# Altium PCB PCB_Stellaris.PcbDoc (part 3 of 3)
Units mm, origin at the board's own origin, x right, y up, seen from the top; angles counter-clockwise.
Board outline 50.8 x 63.5 mm, 6 copper layers (L1, L2 (GND), L3, L4, L5 (VCC), L6), stack 1.551 mm thick; 95 components, 90 nets, 373 pads, 126 vias.
Unrouted connection lines stored in the file: 1.
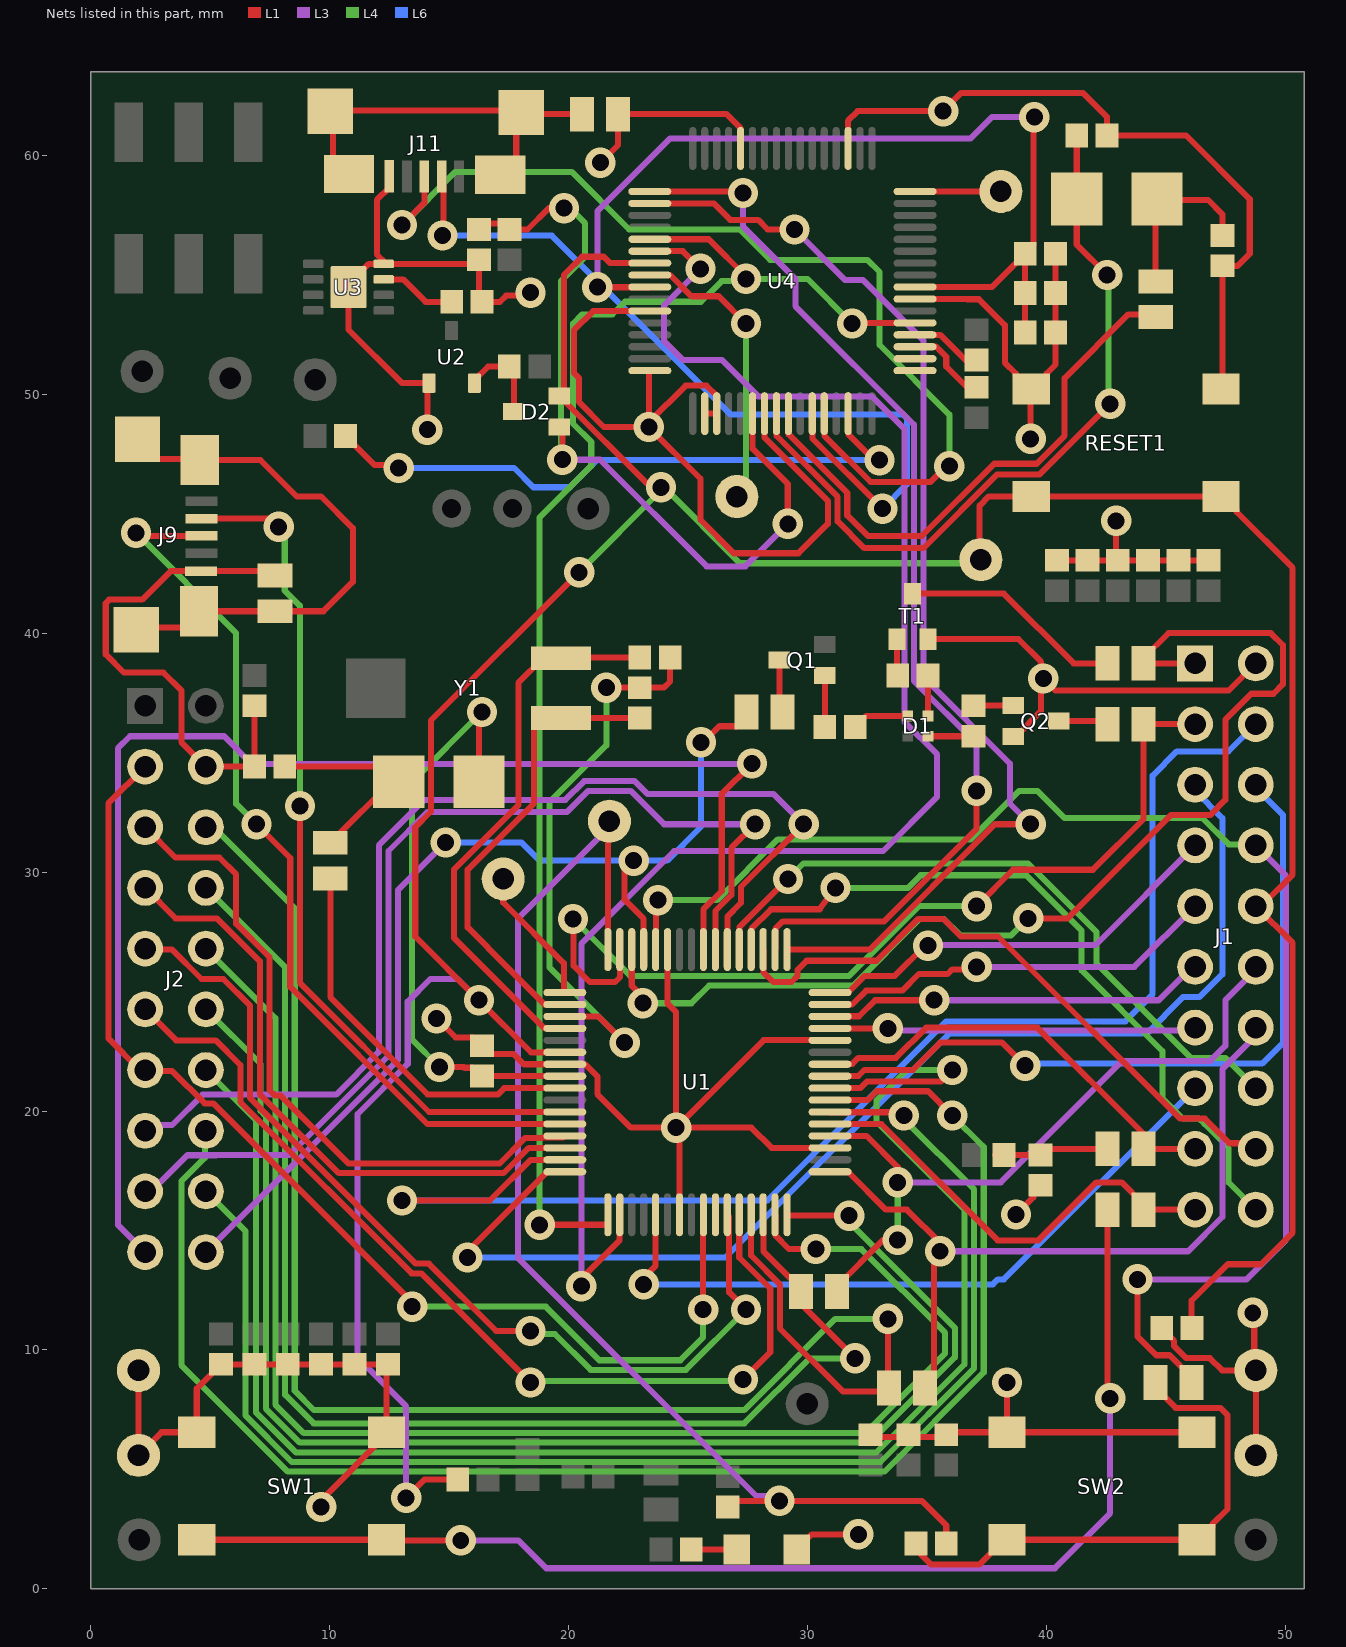
[diagram p6: the nets of this part, all layers, seen from the top]

## Via types
v1: diameter 1.27, hole 0.711, L1 to L4, 52 vias
v2: diameter 1.27, hole 0.711, L1 to L3, 39 vias
v3: diameter 1.27, hole 0.711, L1 to L2 (GND), 14 vias
v4: diameter 1.27, hole 0.711, L3 to L6, 12 vias
v5: diameter 1.27, hole 0.711, L1 to L5 (VCC), 6 vias
v6: diameter 1.27, hole 0.711, L3 to L4, 2 vias
v7: diameter 1.27, hole 0.711, L1 to L6, 1 vias

## Nets (pads, with @x,y where several pads share a name; then routed paths per layer and width w, separated by ;. In a path a pad name is that pad's centre, name@x,y a point inside that pad or via, vN(x,y) a via of type N, cw(c..) or ccw(c..) an arc to the next point about the centre after c; other vN are vias at no path point) (continued)
DEBUG_PC2/TDI: U1.50 U4.22 | length 69.1
  L1 w0.254: v2(20.541,12.671) 20.541,12.988 22.141,14.588 22.141,15.65 U1.50@22.15,15.659 ; U4.22@23.406,55.987 24.785,55.987 v2(25.527,55.245)
  L3 w0.254: v2(20.541,12.671) 20.541,26.998 24.427,30.884 33.17,30.884 35.433,33.147 35.433,34.925 34.059,36.299 34.059,48.555 32.703,49.911 27.94,49.911 26.416,51.435 24.787,51.435 24.003,52.219 24.003,53.721 v2(25.527,55.245)
DEBUG_PC3/TDO/SWO: U1.49 U4.21 U4.53 | length 62.8
  L1 w0.254: v1(18.796,15.24) 21.629,15.24 21.65,15.261 U1.49@21.65,15.659 ; U4.21@23.406,56.487 25.873,56.487 27.432,54.928 v1(27.432,54.829) ; v1(31.877,52.959) 31.896,52.978 34.497,52.978 U4.53@34.506,52.987
  L4 w0.254: v1(18.796,15.24) 18.796,44.845 20.955,47.004 20.955,48.006 20.193,48.768 20.193,52.959 20.574,53.34 21.844,53.34 22.375,53.871 25.55,53.871 26.416,54.737 27.34,54.737 v1(27.432,54.829) 30.007,54.829 v1(31.877,52.959)
EXTDBG: H15.1 U4.24 | length 12.6
  L1 w0.254: U4.24@23.406,54.987 U4.24@23.41,54.991 ; U4.24@23.622,54.991 24.257,54.991 25.146,54.102 26.289,54.102 v1(27.432,52.959)
  L4 w0.254: H15.1@26.289,45.745 H15.1@26.658,46.114 ; H15.1@27.051,45.72 27.432,46.101 v1(27.432,52.959)
GND: C1.1 C2.1 C3.1 C4.1 C5.1 C6.2 C7.2 C8.2 C10.1 C13.1 C14.1 C15.1 C16.1 C17.1 C18.1 C19.1 C20.1 C21.1 C22.1 C23.1 C25.2 C26.2 C27.2 C28.1 C29.1 C30.1 D3.2 H10.1 H11.1 H12.1 H13.1 J1.11 J2.12 J9.5 J11.5 Q2.2 R2.2 R12.1 R25.2 RESET1.1 RESET1.2 SW1.3 SW1.4 SW2.3 SW2.4 T1.2 U1.3 U1.12 U1.27 U1.39 U1.55 U2.1 U3.4 U3.9 U4.3 U4.12 U4.27 U4.32 U4.34 U4.35 U4.39 U4.55 | length 252
  L1 w0.254: H13.1@2.007,9.144 H12.1@2.007,5.588 2.976,6.557 SW1.4@4.445,6.557 4.445,8.382 5.088,9.025 5.088,9.05 5.436,9.398 C10.1@5.461,9.398 C3.1@6.858,9.398 C1.1@8.255,9.398 C2.1@9.652,9.398 C4.1@11.049,9.398 C5.1@12.446,9.398 12.395,9.347 SW1.3@12.395,6.557 12.446,6.506 9.652,3.712 v3(9.652,3.429) ; C15.1@6.858,36.957 6.858,34.683 6.87,34.671 6.616,34.417 J2.12@4.826,34.417 3.799,35.444 3.799,37.603 3.048,38.354 1.395,38.354 0.635,39.114 0.635,41.253 0.784,41.402 2.159,41.402 3.351,42.594 J9.5@4.627,42.594 7.547,42.594 R2.2@7.722,42.419 R2.2@7.747,42.394 ; J11.5@12.495,59.127 12.495,58.648 11.985,58.137 11.985,55.847 U3.4@12.374,55.458 ; v3(14.097,48.514) 14.097,50.396 U2.1@14.163,50.462 ; U2.1@14.102,50.462 13.038,50.462 10.795,52.705 U3.9@10.795,54.483 10.795,54.608 11.645,55.458 U3.4@12.27,55.458 U3.4@12.374,55.458 ; v3(14.478,23.876) 15.273,23.081 16.035,23.081 C13.1@16.383,22.733 16.731,22.385 17.709,22.385 18.135,21.959 U1.39@19.85,21.959 19.859,21.95 20.713,21.95 21.209,21.454 21.209,20.707 22.612,19.304 v3(24.511,19.304) ; C29.1@16.256,55.626 C29.1@16.256,55.458 ; v2(18.415,54.249) 18.297,54.131 17.399,54.131 17.137,53.869 C16.1@16.383,53.869 16.256,53.996 C29.1@16.256,55.458 ; v3(21.336,59.69) 22.074,60.428 R25.2@22.074,61.722 26.625,61.722 27.206,61.141 U4.12@27.206,60.287 ; U4.27@23.397,53.478 21.034,53.478 20.227,52.671 20.227,50.893 20.447,50.673 20.447,49.669 21.49,48.626 v3(23.368,48.626) ; U4.32@23.406,50.987 23.389,50.987 23.368,50.966 v3@23.368,48.825 ; U1.27@24.15,26.759 24.141,26.75 24.141,24.512 24.511,24.142 v3@24.511,19.764 ; U1.55@24.65,15.659 24.641,15.668 24.641,19.174 v3(24.511,19.304) ; U4.34@25.706,49.187 U4.35@26.206,49.187 26.206,49.937 25.779,50.364 24.907,50.364 v3@23.368,48.825 ; U4.39@28.206,49.187 28.215,49.178 28.215,48.182 30.861,45.535 30.861,44.577 29.628,43.344 26.923,43.344 25.527,44.74 25.527,46.467 v3(23.368,48.626) ; D3.2@29.551,1.651 30.186,2.286 v3(32.131,2.286) ; U1.3@30.95,18.459 28.504,18.459 27.659,19.304 24.971,19.304 v3@24.741,19.534 ; U1.12@30.95,22.959 30.941,22.968 28.175,22.968 v3@24.741,19.534 ; U4.3@31.706,60.287 31.706,61.43 31.697,61.439 32.107,61.849 v3(35.687,61.849) 36.449,62.611 41.529,62.611 42.545,61.595 C28.1@42.545,60.833 ; C7.2@32.639,6.35 35.814,6.35 36.021,6.557 SW2.4@38.354,6.557 ; U4.55@34.506,53.987 36.67,53.987 36.682,53.975 37.181,53.975 38.265,52.891 38.265,51.325 38.722,50.868 38.722,50.743 39.245,50.22 RESET1.1@39.37,50.22 ; T1.2@35.052,39.751 38.837,39.751 39.786,38.802 39.786,36.745 38.713,35.672 Q2.2@38.613,35.672 ; v3(38.354,8.636) SW2.4@38.354,6.557 ; v3(38.735,15.668) 39.453,16.386 39.453,16.593 R12.1@39.751,16.891 ; v3(39.345,48.133) 39.345,50.195 RESET1.1@39.37,50.22 ; v3(39.878,38.1) 40.386,37.592 47.625,37.592 J1.11@48.768,38.735 ; C27.2@40.386,55.88 C25.2@40.386,54.229 C26.2@40.386,52.578 40.386,51.236 40.018,50.868 40.018,50.743 39.495,50.22 RESET1.1@39.37,50.22 ; C18.1@40.457,43.048 C19.1@41.724,43.048 C20.1@42.991,43.048 ; C28.1@42.799,60.579 C28.1@42.545,60.833 ; v3(42.926,44.704) 42.926,43.113 C20.1@42.991,43.048 ; C17.1@44.831,10.922 44.831,10.897 45.349,10.379 45.349,10.16 45.852,9.657 46.844,9.657 47.357,9.144 H10.1@48.768,9.144 ; SW2.3@46.304,6.557 SW2.4@38.354,6.557 ; C23.1@46.792,43.048 C22.1@45.525,43.048 C21.1@44.258,43.048 C20.1@42.991,43.048 ; RESET1.2@47.32,50.22 47.371,50.271 C30.1@47.371,55.372 48.006,55.372 48.514,55.88 48.514,58.166 45.847,60.833 C28.1@42.545,60.833 ; v3(48.641,11.557) 48.704,11.493 48.704,9.207 H10.1@48.768,9.144 ; H11.1@48.768,5.588 H10.1@48.768,9.144 ; U3.4@12.374,55.458 C29.1@16.256,55.458 ; v3(23.368,48.626) v3@23.368,48.825 ; v3(24.511,19.304) v3@24.741,19.534 ; v3(24.511,19.304) v3@24.511,19.764 ; v3@24.511,19.764 v3@24.741,19.534
GNDX: C11.2 C12.1 U1.35 | length 23.9
  L1 w0.254: U1.35@19.85,23.959 19.859,23.95 21.262,23.95 v1(22.352,22.86) ; v1(21.59,37.719) C12.1@22.987,37.719 23.999,37.719 24.257,37.977 C11.2@24.257,38.989
  L4 w0.254: v1(21.59,37.719) 21.59,35.306 19.2,32.916 19.2,26.012 v1(22.352,22.86)
HIB_N: H1.1 U1.33 | length 5.8
  L1 w0.254: H1.1@17.272,29.714 17.272,28.727 19.812,26.187 19.812,24.98 19.833,24.959 U1.33@19.85,24.959
ICDI_RST: C29.2 D2.1 R28.1 U4.38 | length 34.2
  L1 w0.254: C29.2@16.063,57.141 R28.1@17.399,57.141 ; R28.1@17.526,56.896 18.288,56.896 19.177,57.785 v1(19.812,57.785) ; D2.1@19.619,48.626 19.746,48.499 v1(19.746,47.259) ; U4.38@27.706,49.187 27.706,47.719 29.18,46.245 v2(29.18,44.577)
  L3 w0.254: v1(19.746,47.259) 21.321,47.259 25.781,42.799 27.402,42.799 v2(29.18,44.577)
  L4 w0.254: v1@19.685,47.296 19.685,54.737 20.701,55.753 20.701,57.15 v1@19.812,58.039
ICDI_TCK: R26.1 U4.52 | length 3.4
  L1 w0.254: U4.52@34.506,52.487 35.56,52.487 36.811,51.236 36.885,51.236 R26.1@37.084,51.435 R26.1@37.338,51.435
ICDI_TDI: U4.50
ICDI_TDO: U4.49
ICDI_TMS: R27.1 U4.51 | length 3.8
  L1 w0.254: U4.51@34.506,51.987 35.389,51.987 35.814,51.562 35.814,51.16 36.682,50.292 R27.1@37.084,50.292 R27.1@37.338,50.292
LED_B: R18.2 T1.3 | length 9.4
  L1 w0.254: T1.3@34.402,41.651 34.407,41.656 38.227,41.656 41.148,38.735 R18.2@42.569,38.735
LED_G: Q2.3 R19.2 | length 2.2
  L1 w0.254: Q2.3@40.413,36.322 Q2.3@40.513,36.322 42.442,36.322 R19.2@42.569,36.195
LED_R: Q1.3 R17.2 | length 2.2
  L1 w0.254: Q1.3@28.834,38.877 28.834,36.825 R17.2@28.956,36.703
NetC11_1: C11.1 U1.36 Y1.2 | length 23.5
  L1 w0.254: U1.36@19.85,23.459 19.841,23.468 18.987,23.468 15.206,27.249 15.206,30.104 17.907,32.805 17.907,37.921 18.935,38.949 Y1.2@19.685,38.949 19.725,38.989 C11.1@22.987,38.989
NetC12_2: C12.2 U1.34 Y1.1 | length 19.5
  L1 w0.254: U1.34@19.85,24.459 19.841,24.468 18.987,24.468 16.636,26.819 16.636,26.835 15.778,27.693 15.778,30.104 18.562,32.888 18.562,36.076 18.935,36.449 Y1.1@19.685,36.449 C12.2@22.987,36.449
NetC13_2: C13.2 U1.40 Y2.2 | length 25.2
  L1 w0.254: v1(14.605,21.844) 15.621,21.844 15.654,21.811 16.035,21.811 C13.2@16.383,21.463 C13.2@16.637,21.717 ; Y2.2@16.256,33.782 16.256,36.576 v1(16.383,36.703) ; C13.2@16.51,21.463 16.514,21.459 U1.40@19.85,21.459
  L4 w0.254: v1(14.605,21.844) 13.462,22.987 13.462,33.782 v1(16.383,36.703)
NetC14_2: C14.2 R8.1 Y2.1 | length 9.4
  L1 w0.254: C14.2@8.128,34.417 12.263,34.417 Y2.1@12.743,33.936 ; R8.1@10.037,31.23 Y2.1@12.743,33.936 ; Y2.1@12.743,33.936 Y2.1@12.898,33.782 12.898,34.09 Y2.1@12.743,33.936
NetC16_2: C16.2 U3.3 | length 3.2
  L1 w0.254: U3.3@12.27,54.808 13.081,54.808 14.02,53.869 C16.2@15.113,53.869
NetC24_2: C25.1 C26.1 C27.1 U4.25 U4.56 | length 39.7
  L1 w0.254: v2(21.209,54.478) 23.397,54.478 U4.25@23.406,54.487 ; U4.56@34.506,54.487 34.515,54.496 37.732,54.496 C27.1@39.116,55.88 ; C26.1@39.116,52.553 C26.1@39.116,52.578 C25.1@39.116,54.229 C27.1@39.116,55.88 ; v2(39.497,61.595) 39.464,61.562 39.464,56.228 C27.1@39.116,55.88
  L3 w0.254: v2(21.209,54.478) 21.209,57.658 24.257,60.706 36.83,60.706 37.719,61.595 v2(39.497,61.595)
NetC28_2: C28.2 U4.40 Y3.2 | length 31.8
  L1 w0.254: U4.40@28.706,49.187 28.715,49.178 28.715,48.253 31.265,45.703 31.265,44.681 32.385,43.561 34.862,43.561 37.948,46.647 39.72,46.647 v1(42.672,49.599) ; C28.2@41.275,60.833 Y3.2@41.275,58.166 41.275,56.261 v1(42.545,54.991)
  L4 w0.254: v1(42.545,54.991) 42.608,54.927 42.608,49.662 v1(42.672,49.599)
NetC30_2: C30.2 R29.1 Y3.1 | length 7.5
  L1 w0.254: R29.1@44.577,54.478 R29.1@44.577,54.725 44.577,58.11 Y3.1@44.633,58.166 ; Y3.1@44.76,58.039 44.851,58.13 46.772,58.13 47.371,57.531 C30.2@47.371,56.642
NetD1_2: D1.2 R1.2 | length 2.4
  L1 w0.254: R1.2@32.004,36.068 32.473,36.537 D1.2@34.202,36.537
NetD1_3: D1.3 R3.2 | length 1.9
  L1 w0.254: D1.3@35.052,35.687 R3.2@36.957,35.687
NetD1_4: D1.4 R4.2 | length 1.7
  L1 w0.254: D1.4@35.052,36.537 R4.2@35.052,38.227
NetD2_3: D2.3 R7.1 U2.2 | length 4.2
  L1 w0.254: U2.2@16.063,50.462 16.063,50.587 16.636,51.16 R7.1@17.526,51.16 17.719,51.353 D2.3@17.719,49.276
NetD3_1: D3.1 R10.1 | length 1.9
  L1 w0.254: R10.1@25.146,1.651 D3.1@27.051,1.651
NetH16_1: H16.1 U4.64 | length 4
  L1 w0.254: U4.64@34.506,58.487 36.872,58.487 37.846,58.487 H16.1@38.342,58.983
NetJ9_6: J9.6 J9.7 J9.8 J9.9 R2.1 | length 22.7
  L1 w0.254: J9.9@1.905,40.136 2.015,40.246 3.867,40.246 J9.7@4.54,40.919 R2.1@7.722,40.919 7.747,40.894 7.772,40.919 9.746,40.919 10.98,42.153 10.98,44.392 9.652,45.72 8.636,45.72 7.112,47.244 J9.6@4.572,47.244 4.52,47.296 2.788,47.296 J9.8@1.965,48.119
NetJ11_2: J11.2 U4.43 | length 34.5
  L1 w0.254: J11.2@14.695,59.114 14.768,59.041 14.768,56.883 14.732,56.847 v2(14.732,56.642) ; U4.43@30.206,49.187 30.215,49.178 30.215,48.144 v2(33.147,45.212)
  L6 w0.254: v2(14.732,56.642) 19.304,56.642 26.797,49.149 34.014,49.149 34.163,49 34.163,46.228 v2(33.147,45.212)
  other v4: 33.147,45.212 14.732,56.642
NetJ11_3: J11.3 U4.44 | length 41.6
  L1 w0.254: v1(13.038,57.081) 13.97,58.013 J11.3@13.97,59.114 ; U4.44@30.706,49.187 30.715,49.178 30.715,48.259 32.642,46.332 35.162,46.332 35.82,46.99 v1(35.941,46.99)
  L4 w0.254: v1(13.038,57.081) 15.266,59.309 20.133,59.309 22.546,56.896 27.178,56.896 28.448,55.626 32.512,55.626 33.02,55.118 33.02,52.07 35.941,49.149 v1(35.941,46.99)
NetJ11_6: J11.6 J11.7 J11.8 J11.9 R25.1 | length 16.3
  L1 w0.254: J11.7@10.82,59.214 10.147,59.887 10.147,61.739 10.28,61.872 17.937,61.872 J11.8@18.02,61.789 ; J11.6@17.145,59.182 17.818,59.855 17.818,61.588 J11.8@18.02,61.789 ; R25.1@20.574,61.722 18.087,61.722 J11.8@18.02,61.789
NetQ1_1: Q1.1 R1.1 | length 2.2
  L1 w0.254: R1.1@30.734,36.068 Q1.1@30.734,38.227
NetQ2_1: Q2.1 R3.1 | length 1.7
  L1 w0.254: R3.1@36.957,36.957 36.972,36.972 Q2.1@38.613,36.972
NetR4_1: R4.1 T1.1 | length 1.5
  L1 w0.254: T1.1@33.752,39.751 33.752,38.257 R4.1@33.782,38.227
NetR8_2: R8.2 U1.41 | length 16.6
  L1 w0.254: R8.2@10.037,29.73 10.037,24.766 14.102,20.701 17.057,20.701 17.315,20.959 U1.41@19.85,20.959
NetR11_2: R11.2 R12.2 R13.1 | length 4.8
  L1 w0.254: R13.1@37.846,18.161 R12.2@39.751,18.161 40.005,18.415 R11.2@42.569,18.415
NetR24_1: R24.1 U4.46 | length 26.3
  L1 w0.254: R24.1@10.668,48.26 10.668,48.235 11.016,47.887 11.041,47.887 11.882,47.046 12.764,47.046 v4(12.898,46.912) ; U4.46@31.706,49.187 31.715,49.178 31.715,48.324 32.795,47.244 v7(33.02,47.244)
  L6 w0.254: v4(12.898,46.912) 17.731,46.912 18.535,46.108 20.059,46.108 21.195,47.244 v7(33.02,47.244)
  other v2: 12.898,46.912
NetR29_2: R29.2 U4.41 | length 23.8
  L1 w0.254: U4.41@29.206,49.187 29.215,49.178 29.215,48.324 31.669,45.87 31.669,44.931 32.531,44.069 34.798,44.069 37.821,47.092 39.594,47.092 40.767,48.265 40.767,50.673 43.434,53.34 43.966,53.34 44.081,53.225 R29.2@44.577,53.225
PA0/U0RX_VCP_TXD: U1.17 U4.18 | length 48.3
  L1 w0.254: U4.18@23.406,57.987 26.087,57.987 26.774,57.3 27.936,57.3 28.34,56.896 v2(29.464,56.896) ; U1.17@29.15,26.759 32.601,26.759 37.846,32.004 v2(39.345,32.004)
  L3 w0.254: v2(29.464,56.896) 31.573,54.787 32.319,54.787 34.867,52.239 34.867,38.158 38.481,34.544 38.481,32.868 v2(39.345,32.004)
PA1/U0TX_VCP_RXD: U1.18 U4.17 | length 45.3
  L1 w0.254: U4.17@23.406,58.487 26.991,58.487 v2@27.013,58.509 ; U1.18@28.65,26.759 28.659,26.768 28.659,27.622 28.977,27.94 33.211,27.94 37.084,31.813 v2(37.084,33.401)
  L3 w0.254: v2(27.305,58.42) 27.305,57.023 29.499,54.829 29.499,53.686 34.463,48.722 34.463,37.991 37.084,35.37 v2(37.084,33.401)
PA2: J1.19 U1.19 | length 27
  L1 w0.254: U1.19@28.15,26.759 28.159,26.75 28.159,25.816 28.575,25.4 29.337,25.4 29.591,25.654 29.591,25.908 29.972,26.289 32.893,26.289 34.648,28.044 35.683,28.044 36.422,27.305 37.98,27.305 45.6,19.685 46.631,19.685 47.663,18.653 48.53,18.653 J1.19@48.768,18.415
PA3: J1.20 U1.20 | length 31.7
  L1 w0.254: U1.20@27.65,26.759 27.659,26.768 27.659,27.622 28.483,28.446 30.518,28.446 v1(31.179,29.343)
  L4 w0.254: v1(31.179,29.343) 34.217,29.343 34.742,29.868 39.157,29.868 41.48,27.545 41.48,25.894 44.863,22.511 44.863,20.542 45.72,19.685 46.41,19.685 46.609,19.486 ; 46.653,19.442 47.625,18.47 47.625,17.018 J1.20@48.768,15.875
PA4: J1.18 U1.21 | length 28.3
  L1 w0.254: U1.21@27.15,26.759 27.159,26.768 27.159,27.693 29.18,29.714 v1(29.19,29.714)
  L4 w0.254: v1(29.19,29.714) 29.84,30.364 39.232,30.364 42.109,27.487 42.109,26.162 46.046,22.225 47.498,22.225 J1.18@48.768,20.955
PA5: J2.8 U1.22 | length 46
  L1 w0.254: U1.22@26.65,26.759 26.65,28.136 27.224,28.71 27.224,29.383 v2(29.845,32.004)
  L3 w0.254: J2.8@2.286,19.177 2.524,19.415 3.413,19.415 4.688,20.69 10.276,20.69 12.065,22.479 12.065,31.115 13.97,33.02 19.876,33.02 20.661,33.805 22.773,33.805 23.304,33.274 28.575,33.274 v2(29.845,32.004)
PA6: J2.9 U1.23 | length 44
  L1 w0.254: U1.23@26.15,26.759 26.15,28.373 26.82,29.043 26.82,31.011 v2(27.813,32.004)
  L3 w0.254: J2.9@2.286,16.637 2.54,16.637 4.053,18.15 5.251,18.15 5.262,18.161 8.319,18.161 12.469,22.311 12.469,30.884 14.097,32.512 19.939,32.512 20.828,33.401 22.606,33.401 24.003,32.004 v2(27.813,32.004)
PA7: J2.10 U1.24 | length 57.4
  L1 w0.254: U1.24@25.65,26.759 25.65,28.444 26.416,29.21 26.416,33.274 v2(27.686,34.544)
  L3 w0.254: J2.10@2.286,14.097 1.143,15.24 1.143,35.179 1.651,35.687 5.588,35.687 6.754,34.521 27.663,34.521 v2(27.686,34.544)
PB0: J2.3 U1.45 | length 28.3
  L1 w0.254: J2.3@2.286,31.877 3.556,30.607 5.397,30.607 6.096,29.909 6.096,27.836 7.489,26.443 7.489,20.876 7.722,20.643 7.958,20.643 10.798,17.803 17.116,17.803 18.176,18.863 18.9,18.863 18.923,18.886 19.777,18.886 U1.45@19.85,18.959
PB1: J2.4 U1.46 | length 26.2
  L1 w0.254: J2.4@2.286,29.337 3.556,28.067 5.287,28.067 7.085,26.27 7.085,20.708 10.394,17.399 17.284,17.399 18.344,18.459 U1.46@19.85,18.459
PB2: J1.12 U1.47 | length 56.9
  L1 w0.254: v2(13.038,16.256) 16.712,16.256 18.415,17.959 U1.47@19.85,17.959
  L6 w0.254: v2(13.038,16.256) 28.321,16.256 35.814,23.749 43.307,23.749 44.45,24.892 44.45,34.036 45.466,35.052 47.625,35.052 J1.12@48.768,36.195
  other v4: 13.038,16.256
PB3: J1.3 U1.48 | length 50.6
  L1 w0.254: v2(15.778,13.871) 15.778,14.125 19.112,17.459 U1.48@19.85,17.459
  L6 w0.254: v2(15.778,13.871) 26.571,13.871 35.941,23.241 44.196,23.241 45.72,24.765 46.41,24.765 47.371,25.726 47.371,32.258 46.228,33.401 J1.3@46.228,33.655
  other v4: 15.778,13.871
PB4: U1.58
PB5: J2.2 J2.7 U1.57 | length 48.1
  L1 w0.254: J2.2@2.286,34.417 0.747,32.878 0.747,23.038 2.068,21.717 J2.7@2.286,21.717 2.329,21.674 3.417,21.674 4.771,20.32 5.135,20.32 13.462,11.993 v1(13.462,11.811) ; v1(25.641,11.684) 25.641,15.65 U1.57@25.65,15.659
  L4 w0.254: v1(13.462,11.811) 19.05,11.811 21.29,9.571 24.684,9.571 25.641,10.528 v1(25.641,11.684)
PB6: J1.17 R14.2 U1.1 | length 32.8
  L1 w0.254: U1.1@30.95,17.459 31.7,17.459 33.284,15.875 34.163,15.875 v2@35.596,14.442 ; R14.2@34.925,8.411 35.298,8.784 35.298,13.595 35.56,13.857 v2(35.56,14.132)
  L3 w0.254: v2(35.56,14.132) 45.938,14.132 47.371,15.566 47.371,21.755 48.768,23.152 J1.17@48.768,23.495
PB7: J1.16 R15.2 U1.4 | length 29.9
  L1 w0.254: U1.4@30.95,18.959 32.476,18.959 33.782,17.653 v1(33.782,17.018) ; R15.2@31.242,12.446 31.242,12.671 33.176,14.605 v1(33.782,14.605)
  L3 w0.254: v1(33.782,17.018) 38.1,17.018 43.18,22.098 46.863,22.098 47.498,22.733 47.498,24.638 48.768,25.908 J1.16@48.768,26.035
  L4 w0.254: v1(33.782,14.605) v1(33.782,17.018)
PC4: J1.4 U1.16 | length 17.8
  L1 w0.254: U1.16@30.95,24.959 31.7,24.959 32.395,25.654 33.655,25.654 34.925,26.924 v2(35.052,26.924)
  L3 w0.254: v2(35.052,26.924) 35.075,26.947 42.06,26.947 J1.4@46.228,31.115
PC5: J1.5 U1.15 | length 17
  L1 w0.254: U1.15@30.95,24.459 31.877,24.459 32.46,25.042 33.975,25.042 34.669,25.735 35.874,25.735 36.068,25.929 36.978,25.929 v2(37.084,26.035)
  L3 w0.254: v2(37.084,26.035) 43.688,26.035 J1.5@46.228,28.575
PC6: J1.6 U1.14 | length 16.1
  L1 w0.254: U1.14@30.95,23.959 30.959,23.968 32.163,23.968 32.833,24.638 v2(35.306,24.638)
  L3 w0.254: v2(35.306,24.638) 44.704,24.638 46.101,26.035 J1.6@46.228,26.035
PC7: J1.7 U1.13 | length 15.4
  L1 w0.254: U1.13@30.95,23.459 v2(33.368,23.459)
  L3 w0.254: v2(33.368,23.459) 33.459,23.368 46.101,23.368 J1.7@46.228,23.495
PD0: J2.13 R14.1 U1.61 | length 65.7
  L1 w0.254: U1.61@27.65,15.659 27.641,15.65 27.641,13.958 28.852,12.747 28.852,10.899 31.496,8.255 R14.1@33.201,8.255 ; v1(33.368,11.303) 33.368,8.468 R14.1@33.425,8.411
  L4 w0.254: J2.13@4.826,31.877 5.155,31.877 8.546,28.486 8.546,8.292 9.353,7.486 27.356,7.486 31.173,11.303 v1(33.368,11.303)
PD1: J2.14 R15.1 U1.62 | length 55.8
  L1 w0.254: U1.62@28.15,15.659 28.159,15.65 28.159,14.132 29.493,12.798 29.742,12.798 R15.1@29.742,12.446 29.742,11.914 v1(32.004,9.652)
  L4 w0.254: J2.14@4.826,29.337 8.142,26.021 8.142,8.125 9.34,6.927 27.368,6.927 30.093,9.652 v1(32.004,9.652)
PD2: J2.15 U1.63 | length 60.7
  L1 w0.254: U1.63@28.65,15.659 28.659,15.65 28.659,14.796 29.231,14.224 v1(30.353,14.224)
  L4 w0.254: J2.15@4.826,26.797 7.738,23.885 7.738,7.715 8.93,6.523 32.431,6.523 35.768,9.86 35.768,10.714 32.258,14.224 v1(30.353,14.224)
PD3: J2.16 U1.64 | length 59
  L1 w0.254: U1.64@29.15,15.659 29.15,15.642 29.171,15.621 v1(31.75,15.621)
  L4 w0.254: J2.16@4.826,24.257 7.112,21.971 7.112,20.002 7.334,19.78 7.334,7.547 8.763,6.119 32.598,6.119 36.172,9.693 36.172,10.925 31.75,15.347 v1(31.75,15.621)
PD6: J1.8 U1.53 | length 29.6
  L1 w0.254: v4(23.15,12.747) 23.15,13.022 23.65,13.522 U1.53@23.65,15.659
  L6 w0.254: v4(23.15,12.747) 37.766,12.747 37.973,12.954 38.227,12.954 J1.8@46.228,20.955
  other v2: 23.15,12.747
PD7: J1.9 R11.1 U1.10 | length 18.4
  L1 w0.254: U1.10@30.95,21.959 30.959,21.968 31.874,21.968 31.877,21.971 31.882,21.971 32.136,22.225 33.698,22.225 34.968,23.495 39.624,23.495 44.069,19.05 R11.1@44.069,18.415 J1.9@46.228,18.415
PE0: J1.13 U1.9 | length 31.6
  L1 w0.254: U1.9@30.95,21.459 30.959,21.468 32.136,21.468 32.385,21.717 34.417,21.717 35.56,22.86 38.154,22.86 v4(39.116,21.898)
  L6 w0.254: v4(39.116,21.898) 39.2,21.982 49.033,21.982 49.911,22.86 49.911,32.385 48.768,33.528 J1.13@48.768,33.655
  other v2: 39.116,21.898
PE1: J2.17 U1.8 | length 68.8
  L1 w0.254: U1.8@30.95,20.959 30.959,20.968 32.229,20.968 32.493,21.232 35.583,21.232 v1(36.068,21.717)
  L4 w0.254: J2.17@4.826,21.717 6.93,19.613 6.93,7.38 8.595,5.715 32.893,5.715 36.576,9.398 36.576,15.875 32.893,19.558 32.893,20.447 34.163,21.717 v1(36.068,21.717)
PE2: J2.18 U1.7 | length 64.4
  L1 w0.254: U1.7@30.95,20.459 32.524,20.459 32.893,20.828 35.052,20.828 v1(36.068,19.812)
  L4 w0.254: J2.18@4.826,19.177 4.783,19.134 4.783,18.046 3.799,17.062 3.799,9.369 8.261,4.907 33.228,4.907 37.384,9.063 37.384,18.496 v1(36.068,19.812)
PE3: J2.19 U1.6 | length 58.7
  L1 w0.254: U1.6@30.95,19.959 30.959,19.95 33.898,19.95 v1(34.036,19.812)
  L4 w0.254: J2.19@4.826,16.637 6.477,14.986 6.477,7.262 8.428,5.311 33.06,5.311 36.98,9.231 36.98,16.718 34.036,19.662 v1(34.036,19.812)
  L6 w0.254: J2.19@4.318,17.018 4.763,16.573 J2.19@4.826,16.637
PE4: J2.5 U1.59 | length 40.1
  L1 w0.254: J2.5@2.286,26.797 2.329,26.754 3.417,26.754 4.644,25.527 5.56,25.527 6.681,24.407 6.681,20.541 13.61,13.612 14.159,13.612 16.976,10.795 v1(18.415,10.795) ; U1.59@26.65,15.659 26.723,15.586 26.723,12.412 27.432,11.703 v1(27.432,11.684)
  L4 w0.254: v1(18.415,10.795) 18.542,10.668 19.431,10.668 20.932,9.167 24.915,9.167 v1(27.432,11.684)
PE5: J2.6 U1.60 | length 40.4
  L1 w0.254: J2.6@2.286,24.257 3.584,22.959 5.235,22.959 6.277,21.917 6.277,20.374 13.442,13.208 13.843,13.208 v1(18.415,8.636) ; U1.60@27.15,15.659 27.15,13.871 28.448,12.573 28.448,9.906 v1(27.305,8.763)
  L4 w0.254: v1(18.415,8.636) 18.479,8.7 27.241,8.7 v1(27.305,8.763)
PF0: J1.14 R16.1 U1.28 | length 59.5
  L1 w0.254: U1.28@23.65,26.759 23.659,26.768 23.659,28.739 v1(23.749,28.829) ; v2(43.815,12.954) 43.815,10.571 44.607,9.779 45.159,9.779 46.077,8.861 R16.1@46.077,8.636
  L3 w0.254: v2(43.815,12.954) 48.387,12.954 50.038,14.605 50.038,29.845 J1.14@48.768,31.115
  L4 w0.254: v1(23.749,28.829) 26.225,28.829 28.765,31.369 36.83,31.369 38.862,33.401 39.624,33.401 40.767,32.258 46.537,32.258 47.637,31.158 48.725,31.158 J1.14@48.768,31.115
PF1: J2.20 R17.1 U1.29 | length 43.6
  L1 w0.254: v4(22.733,30.48) 22.352,30.099 22.352,28.838 23.15,28.04 U1.29@23.15,26.759 ; v2@25.4,35.184 v2@25.55,35.334 ; v2(25.55,35.433) v2@25.55,35.334 ; R17.1@27.456,36.703 27.456,36.478 27.083,36.105 26.321,36.105 v2@25.55,35.334
  L3 w0.254: J2.20@4.826,14.097 12.873,22.144 12.873,29.256 v4(14.859,31.242)
  L6 w0.254: v4(14.859,31.242) 18.034,31.242 18.796,30.48 v4(22.733,30.48) 24.13,30.48 25.55,31.9 v2(25.55,35.433)
  other v2: 22.733,30.48
  other v4: 25.55,35.433
PF2: J1.1 R18.1 U1.30 | length 47.8
  L1 w0.254: U1.30@22.65,26.759 22.65,25.251 23.114,24.787 v1(23.114,24.512) ; v1(39.243,28.067) 40.894,28.067 45.212,32.385 46.863,32.385 47.498,33.02 47.498,36.377 48.586,37.465 49.508,37.465 49.903,37.86 49.903,39.505 49.403,40.005 45.114,40.005 44.069,38.96 R18.1@44.069,38.735 J1.1@46.228,38.735
  L4 w0.254: v1(23.114,24.512) 25.147,24.512 25.885,25.25 31.917,25.25 34.711,28.044 35.71,28.044 36.405,27.349 38.525,27.349 v1(39.243,28.067)
PF3: J1.2 R19.1 U1.31 | length 39.2
  L1 w0.254: v1(20.193,28.04) 20.216,28.017 20.216,26.079 20.895,25.4 21.955,25.4 22.159,25.604 22.159,26.75 U1.31@22.15,26.759 ; v1(37.084,28.575) 38.608,30.099 41.95,30.099 44.069,32.218 R19.1@44.069,36.195 J1.2@46.228,36.195
  L4 w0.254: v1(20.193,28.04) 22.579,25.654 31.75,25.654 34.671,28.575 v1(37.084,28.575)
PF4: J1.10 R21.1 U1.5 | length 18.9
  L1 w0.254: U1.5@30.95,19.459 33.099,19.459 37.97,14.588 39.665,14.588 42.095,17.018 43.151,17.018 44.069,16.1 R21.1@44.069,15.875 J1.10@46.228,15.875
TARGETRST: C17.2 D2.2 H9.1 J1.15 R9.1 RESET1.3 RESET1.4 U1.38 U4.23 | length 143.4
  L1 w0.254: v2(13.208,3.81) 13.97,4.572 R9.1@15.367,4.572 ; U1.38@18.987,22.468 19.841,22.468 U1.38@19.85,22.459 18.435,22.459 v2(16.256,24.638) 13.589,27.305 13.589,31.877 14.249,32.537 14.249,36.347 v1(20.447,42.545) ; U4.23@23.406,55.487 21.742,55.487 21.476,55.753 20.574,55.753 19.812,54.991 19.812,50.119 D2.2@19.619,49.926 23.444,46.101 v1(23.876,46.101) ; H9.1@37.211,43.053 37.211,45.339 37.595,45.723 39.367,45.723 RESET1.3@39.37,45.72 RESET1.4@47.32,45.72 47.445,45.72 47.968,45.197 47.968,45.072 50.307,42.733 50.307,29.896 48.986,28.575 J1.15@48.768,28.575 50.307,27.036 50.307,14.91 48.986,13.589 47.601,13.589 46.077,12.065 C17.2@46.077,10.795
  L3 w0.254: v2(13.208,3.81) 13.208,7.642 11.176,9.674 11.176,19.876 13.277,21.977 13.277,24.58 14.224,25.527 15.367,25.527 v2(16.256,24.638)
  L4 w0.254: v1(20.447,42.545) 23.876,45.974 v1(23.876,46.101) 24.003,46.101 27.178,42.926 37.11,42.926 H9.1@37.262,43.078
USB_DM: J9.2 U1.43 | length 36.2
  L1 w0.254: J9.2@4.64,44.794 7.53,44.794 v1(7.874,44.45) ; v1(8.763,32.766) 8.763,25.361 14.165,19.959 U1.43@19.85,19.959
  L4 w0.254: v1(7.874,44.45) 8.128,44.196 8.128,41.783 8.763,41.148 v1(8.763,32.766)
USB_DP: J9.3 U1.44 | length 38.3
  L1 w0.254: v1(1.905,44.196) 2.032,44.069 J9.3@4.64,44.069 ; v1(6.946,32.004) 8.359,30.591 8.359,25.194 14.094,19.459 U1.44@19.85,19.459
  L4 w0.254: v1(1.905,44.196) 6.096,40.005 6.096,32.854 v1(6.946,32.004)
USR_SW1: R21.2 SW1.1 SW1.2 | length 52.4
  L1 w0.254: SW1.2@4.445,2.057 SW1.1@12.395,2.057 12.42,2.032 v2(15.494,2.032) ; R21.2@42.569,15.875 42.569,8.08 v2(42.672,7.977)
  L3 w0.254: v2(15.494,2.032) 17.906,2.032 19.072,0.866 40.363,0.866 42.672,3.175 v2(42.672,7.977)
USR_SW2: R16.2 R20.2 SW2.1 SW2.2 | length 22.2
  L1 w0.254: R20.2@34.544,1.905 34.544,1.651 35.179,1.016 37.188,1.016 38.229,2.057 SW2.2@38.354,2.057 SW2.1@46.304,2.057 46.429,2.057 46.952,2.58 46.952,2.705 47.591,3.344 47.591,7.273 47.289,7.575 45.413,7.575 44.577,8.411 R16.2@44.577,8.636
WAKE: H5.1 R6.2 R20.1 U1.32 | length 49.9
  L1 w0.254: U1.32@21.65,26.759 21.659,26.768 H5.1@21.659,32.004 ; R6.2@26.67,3.429 26.924,3.683 v2(28.834,3.683) 34.788,3.683 35.814,2.657 R20.1@35.814,1.905
  L3 w0.254: H5.1@21.336,31.496 17.884,28.044 17.884,13.866 27.873,3.877 28.64,3.877 v2(28.834,3.683)
pads on no net: J9.4 J11.4 Q1.2 U3.2 U3.6 U3.7 U4.1 U4.4 U4.5 U4.6 U4.7 U4.8 U4.9 U4.10 U4.13 U4.14 U4.15 U4.16 U4.28 U4.31 U4.33 U4.36 U4.47 U4.48 U4.57 U4.58 U4.59 U4.60 U4.61 U4.62 U4.63 Y1.

## Polygon pours and split planes (outlines as drawn)
GND on L2 (GND) (split plane): 50.29,0.51 0.51,0.51 0.51,62.99 50.29,62.99
+3.3V on L5 (VCC) (split plane): 50.29,0.51 0.51,0.51 0.51,62.99 50.29,62.99

## Keep-outs
Keep-Out Layer:
  the board outline again, w0.432

## Text inside footprints (layer, text, board x,y; h text height)
D3: Top Overlay "+" at 26.551,-0.399 h0.8
J1: Top Overlay "20" at 48.514,13.335 h0.8; Top Overlay "1" at 45.253,40.935 h0.8 r270
J2: Top Overlay "20" at 0.889,11.557 h0.8; Top Overlay "1" at 1.524,38.862 h0.8 r270